# Altium PCB RF-433RX.PcbDoc
Units mil, origin at the board's own origin, x right, y up, seen from the top; angles counter-clockwise.
Board outline 540 x 1023.62 mil, 2 copper layers (Top Layer, Bottom Layer), stack 42.17 mil thick; 26 components, 20 nets, 82 pads, 104 vias.
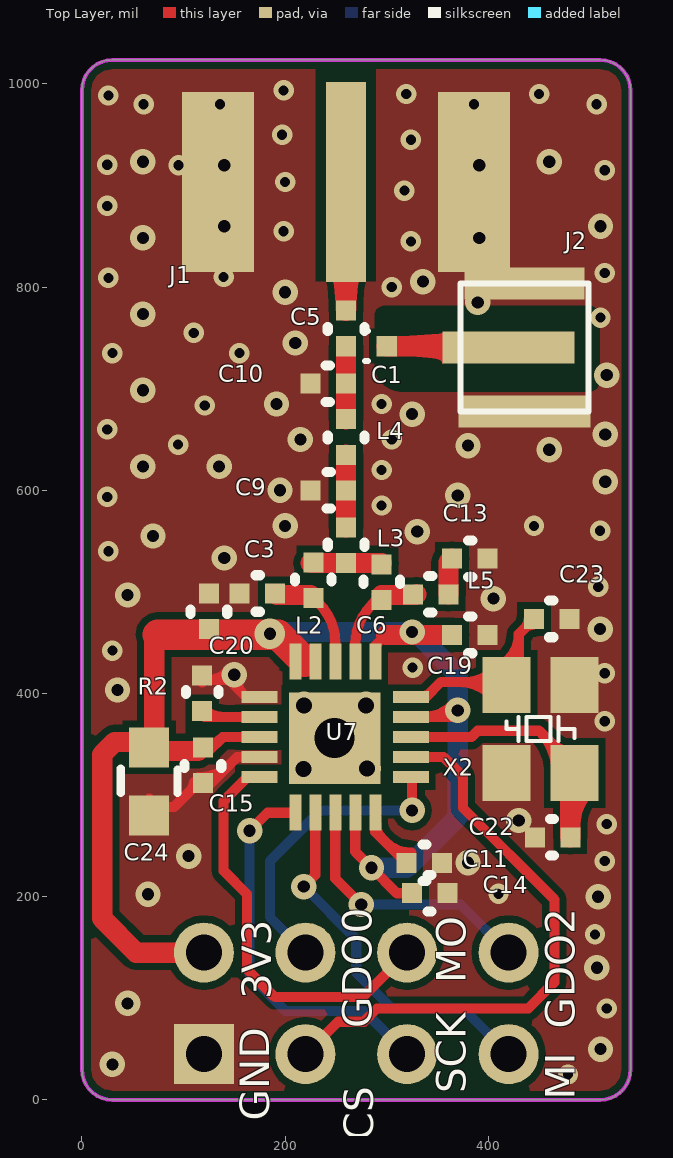
[diagram p0: Top Layer view]
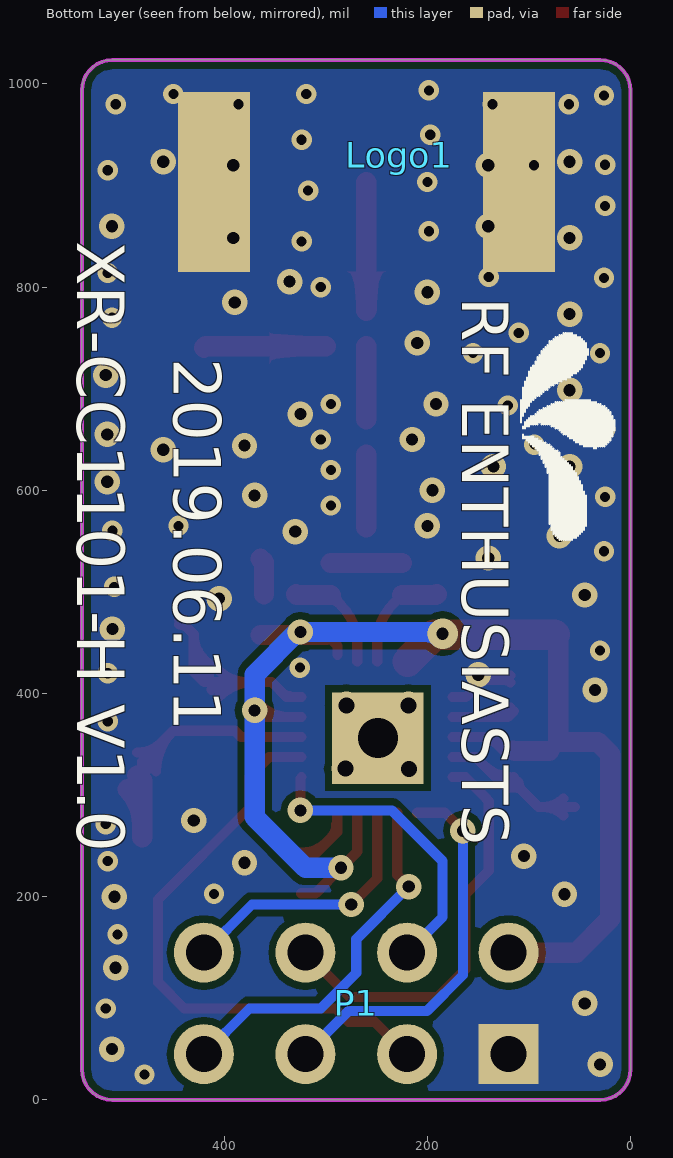
[diagram p1: Bottom Layer view, seen from below]

## Layer stack, top to bottom
Top Solder: solder mask 0.4, Solder Resist, Dk 3.5
Top Layer: signal copper 1.4
Dielectric1: core 39.3701, FR-4, Dk 4.8
Bottom Layer: signal copper 1.4
Bottom Solder: solder mask 0.4, Solder Resist, Dk 3.5

## Board outline
0,30 0,993.62 cw(c30,993.62) 30,1023.62 510,1023.62 cw(c510,993.62) 540,993.62 540,30 cw(c510,30) 510,0 30,0 cw(c30,30)

## Design rules (kind name [scope] priority, off if disabled: settings)
Clearance Clearance_1 [All vs InPolygon] p1: gap=7 ignorepadtopadclearanceinfootprint=TRUE
Clearance [All] p2: gap=6 ignorepadtopadclearanceinfootprint=TRUE
FabricationTestPointUsage TestPointUsage [All] p1: valid=0 allowmultiple=FALSE
FabricationTestpoint Testpoint [All] p1: side=3 testpointundercomponent=TRUE minsize=40 maxsize=100 preferedsize=60 minholesize=0 maxholesize=40 preferedholesize=32 testpointgrid=1 allowsidetop=TRUE allowsidebottom=TRUE usegrid=TRUE gridtolerance=0.01
PolygonConnect [All] p1: connectstyle=Direct reliefconductorwidth=10 reliefentries=4 polygonreliefangle="90 Angle" airgapwidth=10
RoutingVias [All] p1: holewidth=12 width=25 viastyle="Through Hole" minholewidth=10 minwidth=20 maxholewidth=28 maxwidth=50
SilkToSolderMaskClearance SilkscreenOverComponentPads [IsPad] p1: minsilkscreentomaskgap=10 clearancetoexposedcopper=TRUE
SolderMaskExpansion [All] p1: expansion=4
Width [All] p1: maxlimit=40 minlimit=10 preferedwidth=20 minimp=50.000000 maximp=50.000000 favimp=50.000000
27 further rules are at their usual default settings.

## Components (designator, comment, footprint, x,y, rotation, side; value= is the part's Value field where it differs from the comment)
C1 "220P  NC" CAP0402 260,741.85 r0 top
C3 "5.6P" cc0402 155,498.43 r0 top
C5 "220P" cc0402 260,776.85 r270 top
C6 "5.6P" cc0402 295,492.09 r90 top
C9 "6.8P" cc0402 225,600 r0 top
C10 "8.2P" cc0402 260,705 r180 top
C11 "100nF" cc0402 319.25,233.43 r0 top
C13 "220P" cc0402 364.25,532.68 r0 top
C14 "100nF" cc0402 360,203.43 r180 top
C15 "100nF" cc0402 119.13,346.71 r270 top
C19 "100nF" cc0402 364.25,457.68 r0 top
C20 "100nF" cc0402 125,498.43 r270 top
C22 "18P" cc0402 480.75,258.43 r180 top
C23 "20P" cc0402 480,473.43 r180 top
C24 "10uF" cc0603 66.25,280.13 r90 top
J1 "SMA" SMA-ANT-SMT-MIN 260,903.43 r0 top
J2 "SMA" IPEX 435.68,740.35 r90 top
L2 "27nH" ind0402 227.79,494.14 r90 top
L3 "22nH" ind0402 260,528.43 r90 top
L4 "27nH" ind0402 260,670 r270 top
L5 "27nH" ind0402 360.75,497.68 r180 top
Logo1 "Logo" Logo_SiTuo_14mmX5mm 227.79,930 r270 bottom
P1 "Header 4X2" HDR2X4-Z 120,45 r0 bottom
R2 "56k" res0402 118.42,417.6 r270 top
U7 "CC1100" QFN-20 210,282.68 r90 top locked
X2 "26MHz" XTAL-2X3 485,408.43 r270 top

## Footprints (in the part's own frame and the unit in brackets; to place one, negate y for a bottom-side part, rotate by r counter-clockwise, add the part's x,y. Pads: shape width x height; smd on the part's side, far side on the other; paste and mask are expansions set on the pad)
CAP0402 [mil]
  rect 20x20 smd: 1(0,0) 2(40,0)
  silkscreen extent 19,-15 22,15, body extent 0,-10 40,10, height 19
cc0402 [mm] "0402 Capacitor SMD - Startronics"
  rect 0.5x0.5 smd: 1(0,0) 2(0.889,0)
  silkscreen extent 0.41,-0.46 0.51,0.46, body extent 0,-0.25 0.89,0.25, height 0.4
cc0603 [mm] "0603 Capacitor SMD - Startronics"
  rect 1x1 smd: 1(0,0) 2(1.7,0)
  silkscreen extent 0.56,-0.71 1.17,0.71, body extent 0,-0.41 1.73,0.41, height 0.8
HDR2X4-Z [mm] "Connector; Header; 4x2 Position"
  rect 1.5x1.5 hole 0.9: 1(0,0)
  round 1.5 hole 0.9: 2(0,-2.54) 3(2.54,0) 4(2.54,-2.54) 5(5.08,0) 6(5.08,-2.54) 7(7.62,0) 8(7.62,-2.54)
  body extent -1.27,-3.81 8.89,1.27, height 10.1
ind0402 [mm] "0402 Inductor SMD - Startronics"
  rect 0.5x0.5 smd: 1(0,0) 2(0.889,0)
  silkscreen extent 0.41,-0.46 0.51,0.46, body extent 0,-0.25 0.9,0.25, height 0.4
IPEX [mm]
  rect 0.8x3 smd: 0(1.6,0)
  rect 0.8x3.3 smd: 1(0,0.4) 2(-1.6,0)
  silkscreen extent -1.6,-1.6 1.6,1.6, body extent -1.33,-1.3 1.27,1.3, height 1.3
Logo_SiTuo_14mmX5mm [mil]
  silkscreen extent 175,120 379,212
QFN-20 [mm]
  round 0 hole 0.8: 0(1.865,-0.982)
  rect 2.286x2.286 hole 1: 0(1.865,-0.982)
  rect 0.9x0.3 smd: 1(0,0) 2(0,-0.5) 3(0,-1) 4(0,-1.5) 5(0,-2) 11(3.78,-2) 12(3.78,-1.5) 13(3.78,-1) 14(3.78,-0.5) 15(3.78,0)
  rect 0.3x0.9 smd: 6(0.89,-2.89) 7(1.39,-2.89) 8(1.89,-2.89) 9(2.39,-2.89) 10(2.89,-2.89) 16(2.89,0.89) 17(2.39,0.89) 18(1.89,0.89) 19(1.39,0.89) 20(0.89,0.89)
  body extent 0,-2.84 3.81,0.91, height 1
res0402 [mm] "0402 Resistor SMD - Startronics"
  rect 0.5x0.5 smd: 1(0,0) 2(0.889,0)
  silkscreen extent 0.36,-0.41 0.46,0.41, body extent 0,-0.25 0.89,0.25, height 0.2
SMA-ANT-SMT-MIN [mm]
  rect 1.8x4.5 smd far side: 0(-3.81,0) 0(3.81,0)
  rect 1.8x4.5 smd: 0(-3.2,0) 2(3.2,0)
  rect 1x5 smd: 1(0,0)
  body extent -4.85,-1.91 4.67,12.36, height 4.3
XTAL-2X3 [mm] "CRYSTAL SMD 2x3x1mm 4 pads"
  rect 1.4x1.2 smd: 1(0,0) 2(0,-1.7) 3(2.2,-1.7) 4(2.2,0)
  silkscreen extent 0.8,-1.7 1.4,0, body extent -0.36,-1.88 2.54,0.2, height 1

## Part data
C1 C3 C5 C6 C9 C10 C11 C13 C14 C15 C19 C20 C22 C23 C24: library part CAP
L2 L3 L4 L5: library part INDUCTOR
P1: "Header, 4-Pin, Dual row", LatestRevisionDate=17-Jul-2002, LatestRevisionNote="Re-released for DXP Platform.", Publisher="Altium Limited"
R2: library part RES
U7: library part Component_1
X2: library part XO53

## Via types
v1: diameter 25, hole 12, Top Layer to Bottom Layer, tented both sides, 51 vias
v2: diameter 20, hole 10, Top Layer to Bottom Layer, tented both sides, 48 vias
v3: diameter 27.56, hole 15.75, Top Layer to Bottom Layer, tented both sides, 4 vias
v4: diameter 30, hole 12, Top Layer to Bottom Layer, tented both sides, 1 vias

## Nets (pads, with @x,y where several pads share a name; then routed paths per layer and width w, separated by ;. In a path a pad name is that pad's centre, name@x,y a point inside that pad or via, vN(x,y) a via of type N, cw(c..) or ccw(c..) an arc to the next point about the centre after c; other vN are vias at no path point)
+3.3V: C14.2 C15.1 C19.1 C20.2 C24.2 P1.2 U7.4 U7.9 U7.11 U7.14 U7.15 U7.18 | length 1481.7
  Top Layer w10: C15.1@114.25,343.43 C15.1@125,343.43 ; C15.1@115.54,348.99 ccw(c118.68,377.06) 138.66,357.09 ; C15.1@118.42,340.75 cw(c124.88,334.29) C15.1@124.88,343.43 ; C15.1 ccw(c125,350.32) C15.1@125,343.43 ; U7.18 138.66,357.09 ; U7.14@228.75,432.7 U7.14@228.75,434.68 ; U7.4 269.06,244.37 v1(285,228.43) 310,203.43 C14.2@324.25,203.43 ; U7.11@288.36,438.18 288.36,446.79 299.25,457.68 ; U7.9 363.35,376.77 v1(370,383.43) ; U7.9@335.83,376.77 ccw(c335.83,417.6) v1@364.7,388.73 ; C15.1@125,343.43 138.66,357.09
  Top Layer w20: 71.11,460.58 71.11,352.31 32.32,352.31 20,340 20,178.57 53.57,145 P1.2 ; C24.2@80,343.43 C15.1@114.25,343.43 ; 299.25,457.68 C19.1
  Top Layer w30: 74.82,457.93 193.03,457.93 219.46,431.5 ; U7.15@210,440.59 cw(c210,439.7) U7.15@210.63,440.33
  Bottom Layer w20: v4(185,458.91) 185,459.14 186.44,460.58 v1(325,460.58) 327.84,460.58 370,418.43 v1(370,383.43) 370,278.43 320,228.43 v1(285,228.43) ; v4@188.54,455.37 cw(c201.12,442.78) 201.12,460.58
DGND: C3.1 C9.1 C10.2 C11.2 C13.2 C14.1 C15.2 C19.2 C20.1 C22.2 C23.1 C24.1 J1.0 J1.2 J2.0 J2.2 P1.1 R2.1 U7.16 U7.19 X2.1 X2.3 | length 395.1
  Top Layer w10: C24.1@55,288.43 90.75,288.43 115,312.68 127.92,312.68 152.64,337.4 U7.19 ; C24.1 cw(c86.28,260.1) 86.28,288.43 cw(c86.28,316.75) C24.1@66.25,296.72 ; C15.2@110.16,312.68 cw(c98.47,312.68) 106.73,304.41 cw(c115,296.14) C15.2@115,307.83 ; C15.2@115,307.52 ccw(c115,326.25) C15.2@128.24,313.01 ; C15.2@115,317.52 ccw(c115,360.39) 145.31,330.08 ; C15.2@118.42,309.25 cw(c126.69,300.99) 126.69,312.68 cw(c126.69,324.37) C15.2@118.42,316.1 ; R2.1 ccw(c128.5,427.67) 128.5,413.43 ; R2.1@119.13,416.71 ccw(c125,420.32) R2.1@125,413.43 ; v1@144,422.92 cw(c125,437.17) R2.1@125,413.43 ; v1@156.03,413.97 ccw(c163.77,408.26) 156.97,401.46 ; U7.16 161.97,396.46 145,413.43 R2.1@125,413.43 ; R2.1@118.42,410.75 cw(c124.88,404.29) 124.88,413.43 ccw(c124.88,404.29) R2.1@118.42,410.75
  other v1: 30,35 510.45,50 45,95 506.87,130 508.02,200 65,202.47 380,233.43 105,240 430,275 35,403.43 150,418.43 510,463.43 405,493.43 45,496.93 140,533.43 70,555 330,559.4 200,565 370,595 195,600 515,608.43 60,623.43 135,623.43 460,640 380,644 215,650 515,655 325,675 191.5,685 60,698.43 516.62,713.43 210,745 60,773.43 389.6,785 200,795 335.6,805.41 60,848.43 390.98,848.43 140,860 510.45,860 140,920 390.98,920 60,923.43 460,923.43
  other v2: 478.38,25 516.62,90 505,162.92 410,202.78 514.62,235 516.62,271.46 514.62,372.74 514.62,420 325.5,425.45 30,442.22 508.25,505 26.07,540 510.04,560.14 445,565 295,585 25,593.54 295,620 94.66,645 305,650 25,660 120.91,683.45 295,685 30,735 155,735 110,755 510.45,770 305,800 26.07,809.12 139.5,810 514.62,813.88 323.78,845 198.51,855 25,880 317.39,895 200,903.43 514.62,915 25,920.43 95,920 323.78,945 197.09,950 60.75,980 135.97,980 385.98,980 506.64,980 26.07,988.63 319.25,990 450,990 198.51,993.62
GDO0A: P1.4 U7.6 | length 298.4
  Top Layer w10: U7.6 325,316.5 v1(325,285)
  Bottom Layer w10: P1.4 185,180 185,235 235,285 v1(325,285)
GDO2A: P1.8 U7.3 | length 265.5
  Top Layer w10: U7.3 249.37,217.99 v1(275,192.36)
  Bottom Layer w10: v1(275,192.36) 372.64,192.36 P1.8
MISO: P1.7 U7.2 | length 367
  Top Layer w10: v1(218.29,210) 229.68,221.39 U7.2
  Bottom Layer w10: v1(218.29,210) 270,158.29 270,125 305,90 375,90 P1.7
MOSI: P1.6 U7.20 | length 407.5
  Top Layer w10: U7.20 162.72,317.72 141.97,296.97 141.97,296.48 139.5,294.01 139.5,225.5 162.53,202.47 162.53,128.57 189.88,101.22 276.22,101.22 P1.6
NetC1_1: C1.1 C5.2 C10.1 L4.1 | length 71.9
  Top Layer w20: L4.1 C10.1 C1.1
NetC1_2: C1.2 J2.1 | length 120.5
  Top Layer w20: C1.2 418.43,741.85 J2.1
NetC3_2: C3.2 L2.1 U7.13 | length 107.8
  Top Layer w10: L2.1@225,496.93 233.55,488.38 cw(c195.37,450.19) 249.37,450.19 U7.13
  Top Layer w20: C3.2@190.75,497.68 191.5,496.93 L2.1@225,496.93
NetC5_1: C5.1 J1.1 | length 126.6
  Top Layer w20: C5.1 J1.1
NetC6_1: C6.1 L5.2 U7.12 | length 126.8
  Top Layer w10: U7.12 269.06,448.62 cw(c323.06,448.62) 284.87,486.8 C6.1@295,496.93 ; C6.1@290.16,496.93 cw(c278.47,496.93) 286.73,488.66 cw(c295,480.4) C6.1
  Top Layer w20: C6.1@295,496.93 328.5,496.93 L5.2@329.25,497.68
NetC6_2: C6.2 L2.2 L3.1 | length 70
  Top Layer w20: L2.2@225,528.43 C6.2@295,528.43
NetC9_2: C9.2 L3.2 L4.2 | length 71.6
  Top Layer w20: L3.2 C9.2 L4.2
NetC11_1: C11.1 U7.5 | length 104.9
  Top Layer w10: U7.5 288.74,263.94 C11.1 ; U7.5@289.65,270.87 ccw(c308.56,270.87) 295.19,257.49 ; 298.91,253.76 ccw(c324.25,279.1) 324.25,243.27
NetC13_1: C13.1 L5.1 | length 36.5
  Top Layer w20: L5.1 360.75,529.17 C13.1
NetC22_1: C22.1 U7.8 X2.4 | length 392.2
  Top Layer w10: U7.8 350,357.09 ; 358.4,357.09 350,357.09 ; 450.45,362.98 cw(c410.66,323.19) X2.4@466.93,323.19 ; 461.76,351.67 ccw(c485.55,375.46) X2.4@485.55,341.81 ; X2.4@467.52,345.91 cw(c444.8,323.19) X2.4@476.93,323.19 ; X2.4@480.55,318.5 480.55,332.87 450,363.43 389.6,363.43 383.26,357.09 350,357.09
  Top Layer w20: C22.1 480.75,314.45 X2.4@485.55,319.25 ; 480.75,270.83 cw(c530.03,270.83) X2.4@495.18,305.68
NetC23_2: C23.2 U7.10 X2.2 | length 360.6
  Top Layer w10: U7.10 338.43,396.46 353.4,411.43 419.93,411.43 430,421.5 430,458.43 ; U7.10@335.59,397.36 ccw(c335.59,406.41) 341.99,400.01 ; 369.75,411.43 cw(c369.75,360.93) X2.2@405.45,396.64 ; 377.58,411.43 ccw(c377.58,450.84) X2.2@405.45,422.97 ; 393.89,411.43 cw(c393.89,385.07) X2.2@412.53,403.71 ; X2.2@410.27,426.45 ccw(c394.22,458.42) 430,458.42 ; X2.2@414.75,417.51 ccw(c402.36,442.22) 430,442.22 ; C23.2@439.41,472.68 cw(c427.72,472.68) 435.99,464.41 cw(c444.25,456.14) C23.2@444.25,467.83 ; C23.2@444.25,472.68 430,458.43
NetR2_2: R2.2 U7.17 | length 87.4
  Top Layer w10: R2.2@115,382.68 120.91,376.77 U7.17 ; R2.2@118.42,386.1 ccw(c140.95,408.63) 140.95,376.77
RF_CSA: P1.3 U7.7 | length 573.3
  Top Layer w10: P1.3 252,77 277.46,77 290.46,90 439.25,90 465,115.75 465,197.36 375,287.36 375,318.43 356.02,337.4 U7.7
SCLK: P1.5 U7.1 | length 381.7
  Top Layer w10: v1(165,265) 182.68,282.68 U7.1
  Bottom Layer w10: v1(165,265) 165,122.88 200.22,87.66 277.34,87.66 P1.5
pads on no net: U7.0
copper on no net:
  other v3: 218.29,325.77 280.65,326.12 218.65,388.12 279.65,388.12

## Polygon pours and split planes (outlines as drawn)
DGND on Bottom Layer "Keep-Out Layer-No Net" (solid, remove dead copper, pour order 1001): -5,1060 565,1060 565,-30 -5,-30
DGND on Top Layer "Keep-Out Layer-No Net" (solid, remove dead copper, pour order 1000): -10,1045 570,1045 570,-30 -10,-30

## Keep-outs
Keep-Out Layer:
  the board outline again, w3.94

## Other copper
Top Layer:
  pour cut-out: 298.36,781.85 ccw(c298.36,771.85) 288.36,771.85 288.36,723.41 ccw(c314.92,723.41) 314.92,696.85 500,696.85 ccw(c497.41,709.26) 509.83,711.85 509.83,765.75 ccw(c496.86,768.89) 500,781.85
  pour cut-out: 229.83,805.41 289.83,805.41 289.83,1021.41 229.83,1021.41
  pour cut-out: 319.25,713.43
  pour cut-out: 305,713.43
  pour cut-out: 328.5,708.43

## Silkscreen, mask and mechanical layers (free items; w line width, h text height)
Top Overlay:
  text "MO" at 387.55,115 h50 r90
  text "3V3" at 196.34,99.29 h50 r90
  text "GDO0" at 295,70.34 h50 r90
  text "GDO2" at 495,70 h50 r90
  text "SCK" at 387.55,6.61 h50 r90
  text "MI" at 495,0 h50 r90
  text "GND" at 194.34,-20.71 h50 r90
  text "CS" at 296.7,-40 h50 r90
Bottom Overlay:
  text "XR-CC1101-H V1.0" at 560,845 h80 r90
  text "2019.06.11" at 465,730 h80 r90
Drill Drawing:
  lines w2: 729,535 1899,535 ; 729,573.9 1899,573.9 ; 669,327 ccw(c682,327) 682,314 1946,314 ccw(c1946,327) 1959,327 1959,631 ccw(c1946,631) 1946,644 682,644 ccw(c682,631) 669,631 669,327
  text "Layer Stack Up Detail for: Nucleo_64.PcbDoc" at 729,588.35 h27
  text "Layer" at 729,559.4 h9
  text "Gerber" at 979.93,559.4 h9
  text "Copper" at 1103.9,559.4 h9
  text "Dielectric" at 1242.56,559.4 h9
  text "Dielectric" at 1387.53,559.4 h9
  text "Dielectric" at 1573.48,559.4 h9
  text "Dielectric" at 1718.44,559.4 h9
  text "Name" at 729,541.4 h9
  text "Document" at 979.93,541.4 h9
  text "Thickness" at 1103.9,541.4 h9
  text "Height" at 1242.56,541.4 h9
  text "Material" at 1387.53,541.4 h9
  text "Constant" at 1573.48,541.4 h9
  text "Type" at 1718.44,541.4 h9
  text "Top Solder Mask" at 729,513.38 h13
  text "(.GTS)" at 979.93,513.38 h13
  text "0.4mil" at 1242.56,513.38 h13
  text "Solder Resist" at 1387.53,513.38 h13
  text "3.8" at 1573.48,513.38 h13
  text "Top Layer" at 729,472.13 h13
  text "(.GTL)" at 979.93,472.13 h13
  text "1.4mil" at 1103.9,472.13 h13
  text "59.055mil" at 1242.56,451.5 h13
  text "FR-4" at 1387.53,451.5 h13
  text "4.80" at 1573.48,451.5 h13
  text "Core" at 1718.44,451.5 h13
  text "Bottom Layer" at 729,430.88 h13
  text "(.GBL)" at 979.93,430.88 h13
  text "1.4mil" at 1103.9,430.88 h13
  text "Bottom Solder Mask" at 729,389.63 h13
  text "(.GBS)" at 979.93,389.63 h13
  text "0.4mil" at 1242.56,389.63 h13
  text "Solder Resist" at 1387.53,389.63 h13
  text "3.8" at 1573.48,389.63 h13
  text "Notes:" at 669,229 h40
  text "Solder resist color : White" at 715,158.77 h35
  text "BoradH : 1.2mm" at 715,90.85 h35

## Dimensions
0,30 to 540,30 on Drill Drawing
510,1023.62 to 510,0 on Drill Drawing

## Text inside footprints (layer, text, board x,y; h text height)
Logo1: Bottom Overlay "RF ENTHUSIASTS" at 180.79,790 h78.74 r90